# Altium PCB MotorBoardV2.PcbDoc
Units mm, origin at the board's own origin, x right, y up, seen from the top; angles counter-clockwise.
Board outline 45.2 x 89.45 mm, 2 copper layers (Top, Bottom), stack 1.67 mm thick; 40 components, 22 nets, 149 pads, 44 vias.
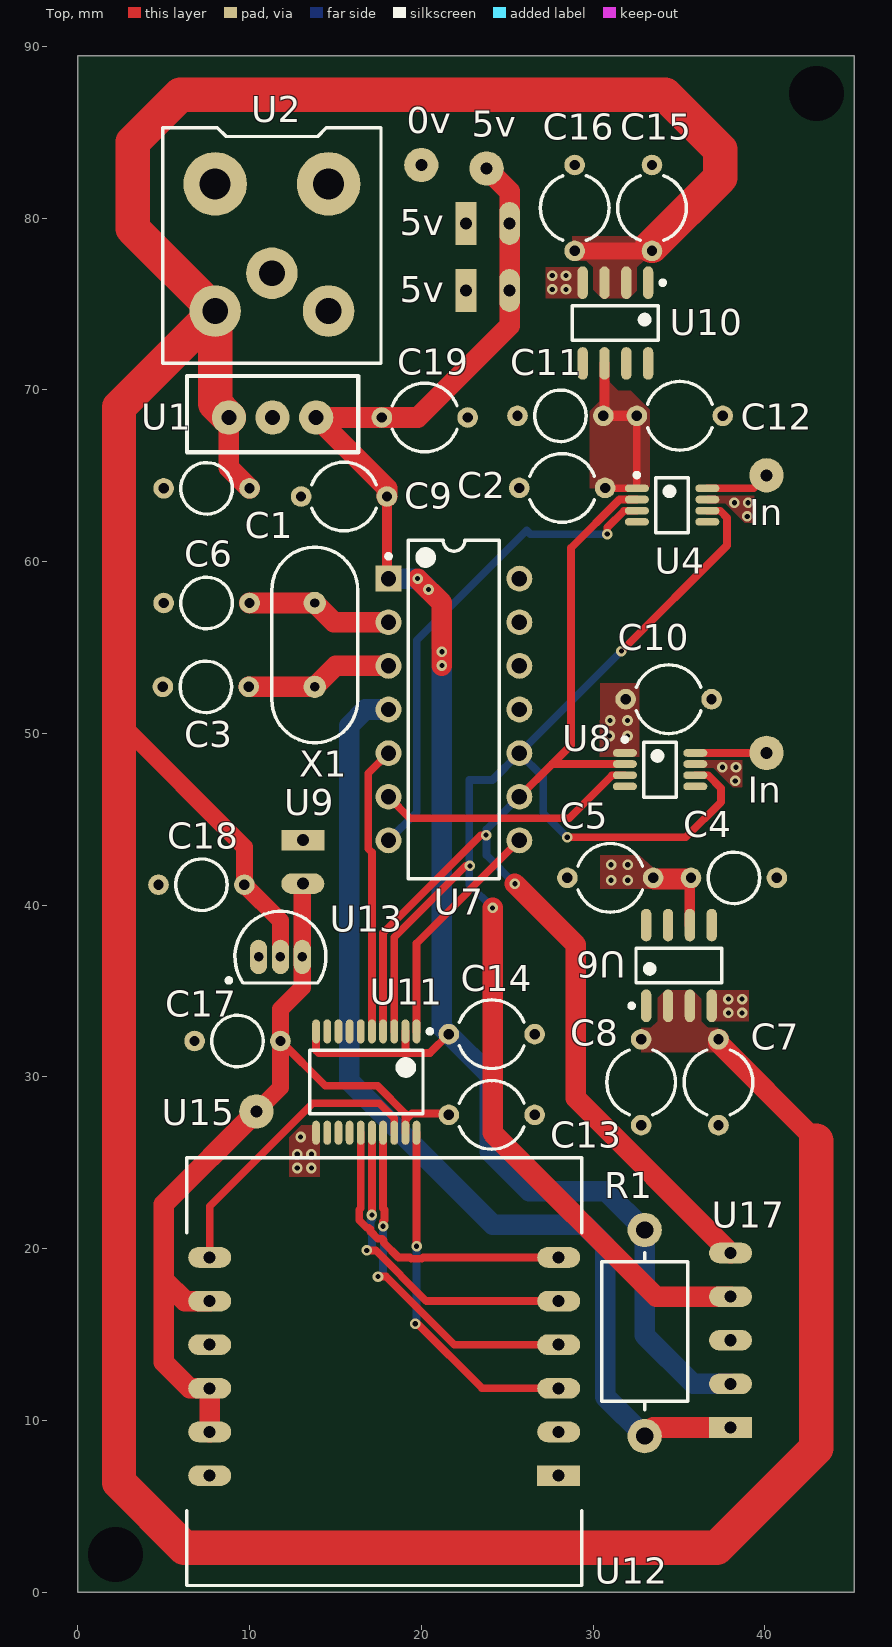
[diagram p0: Top view]
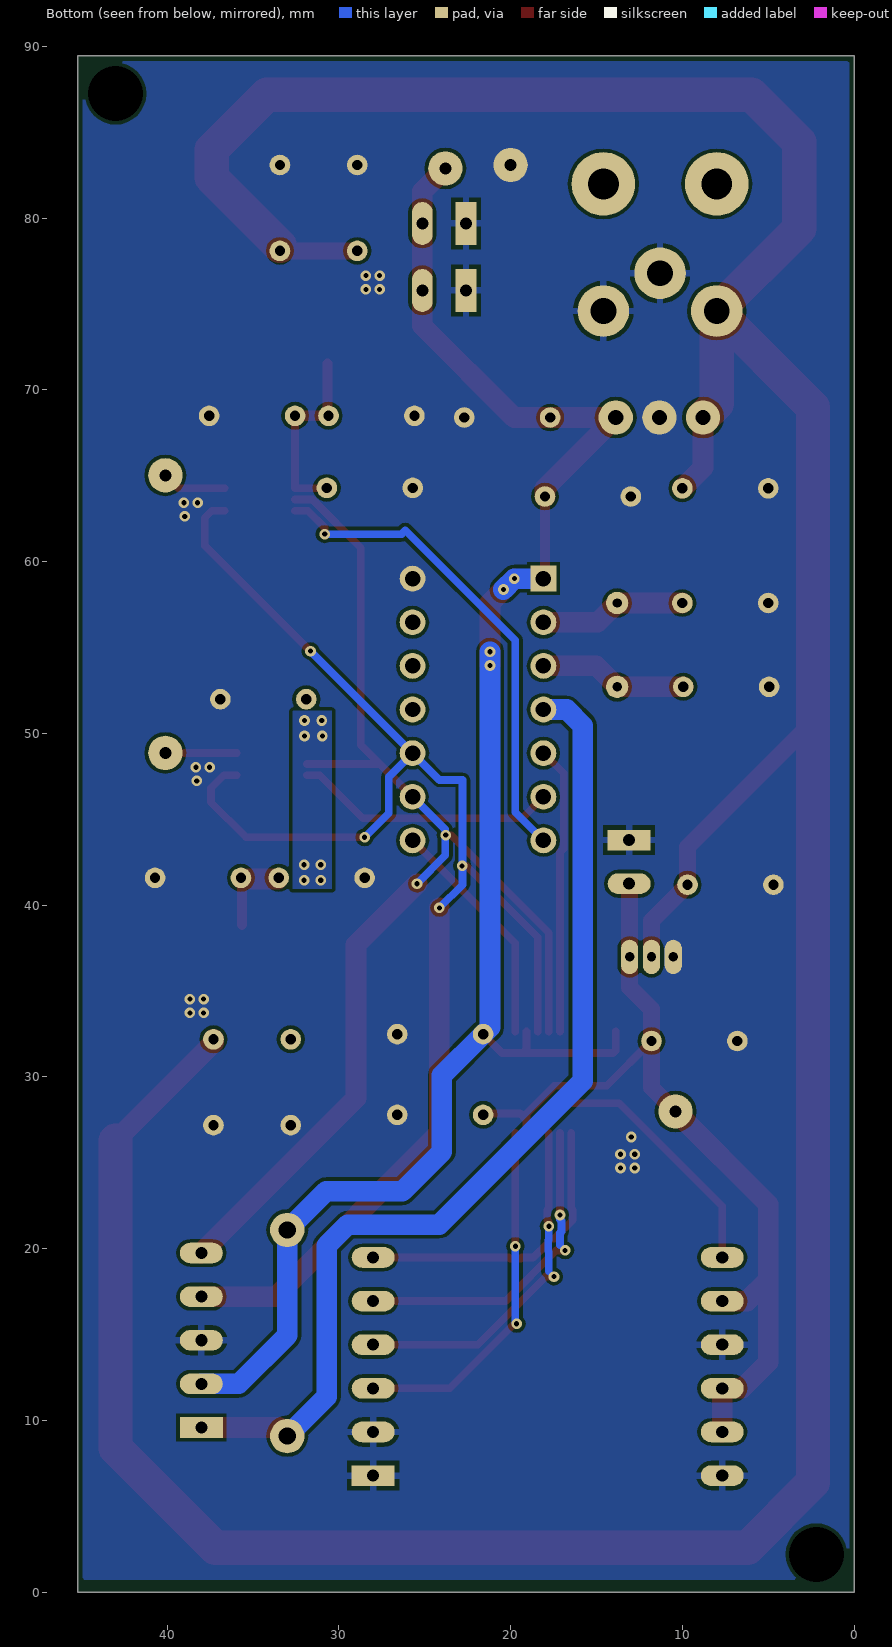
[diagram p1: Bottom view, seen from below]

## Layer stack, top to bottom
Top Solder: solder mask 0.0102, Solder Resist, Dk 3.5
Top: signal copper 0.035
Dielectric1: core 1.6, FR-4, Dk 4.58
Bottom: signal copper 0.035
Bottom Solder: solder mask 0.0102, Solder Resist, Dk 3.5

## Board outline
0,0 0,89.45 45.2,89.45 45.2,0

## Design rules (kind name [scope] priority, off if disabled: settings)
AssemblyTestPointUsage [All] p1 off:
AssemblyTestpoint [All] p1 off: testpointundercomponent=TRUE minsize=1.016 maxsize=2.54 preferedsize=1.524 minholesize=0 maxholesize=1.016 preferedholesize=0.813 testpointgrid=0.025 usegrid=TRUE gridtolerance=0 allowsidetop=TRUE allowsidebottom=TRUE
Clearance ClearanceViaPad [IsVia vs IsPad] p1: gap=0.1
Clearance ClearanceGNDpolygons [InPolygonClass('GNDpolygons')] p2: gap=0.3
Clearance ClearanceTechnology [All] p3: gap=0.2
FabricationTestPointUsage [All] p1 off: valid=0 allowmultiple=FALSE
FabricationTestpoint [All] p1 off: side=3 testpointundercomponent=TRUE minsize=1.016 maxsize=2.54 preferedsize=1.524 minholesize=0 maxholesize=1.016 preferedholesize=0.813 testpointgrid=0.025 allowsidetop=TRUE allowsidebottom=TRUE usegrid=TRUE gridtolerance=0
HoleSize [All] p1: absolutevalues=TRUE maxlimit=6.3 minlimit=0.3 maxpercent=80.000 minpercent=20.000
HoleToHoleClearance [All] p1: gap=0.3 allowstackedmicrovias=TRUE
MinimumAnnularRing [All] p1: minimumring=0.152
MinimumSolderMaskSliver [All] p1: minsoldermaskwidth=0.1
PlaneClearance [All] p1: clearance=0.25
PolygonConnect PolygonConnectVia [IsVia] p1: connectstyle=Direct reliefconductorwidth=0.4 reliefentries=4 polygonreliefangle="90 Angle" airgapwidth=0.254
PolygonConnect PolygonConnectBigPads [(ObjectKind = 'Pad') And ((AsMM(PadXSize_AllLayers) > 2) Or (AsMM(PadYSize_AllLayers) > 2))] p2: connectstyle=Relief reliefconductorwidth=0.4 reliefentries=4 polygonreliefangle="90 Angle" airgapwidth=0.254
PolygonConnect PolygonConnectGeneral [All] p3: connectstyle=Direct reliefconductorwidth=0.3 reliefentries=4 polygonreliefangle="90 Angle" airgapwidth=0.2
RoutingVias [All] p1: holewidth=0.6 width=1.2 viastyle="Through Hole" minholewidth=0.3 minwidth=0.62 maxholewidth=0.9 maxwidth=1.4
SilkToSilkClearance [All] p1: silktosilkclearance=0.15
SilkToSolderMaskClearance SilkscreenOverComponentPads [IsPad] p1: minsilkscreentomaskgap=0.1 clearancetoexposedcopper=FALSE
SolderMaskExpansion [All] p1: expansion=0.1
UnpouredPolygon [All] p1: allowunpoured=FALSE
Width WidthTechnology [All] p1: maxlimit=3 minlimit=0.16 preferedwidth=0.6
19 further rules are at their usual default settings.

## Components (designator, comment, footprint, x,y, rotation, side; value= is the part's Value field where it differs from the comment)
0v "Ground" Ground 20,83.09 r0 top (schematic designator U16)
5v "SignalOut" SignalOut 22.6,75.79 r90 top (schematic designator U3)
5v "SignalOut" SignalOut 22.6,79.69 r90 top (schematic designator U5)
5v "Ref" Ground 23.8,82.89 r0 top (schematic designator U14)
C1 "330nF" "FK18/24 Capacitor" 5,64.265 r0 top
C2 "680nF" "FK26/16 Capacitor" 25.7,64.29 r0 top
C3 "27pF" "FK18/24 Capacitor" 4.952,52.71 r0 top
C4 "1uF" "FK18/24 Capacitor" 40.7,41.59 r180 top
C5 "0.1uF" "FK26/16 Capacitor" 28.5,41.59 r0 top
C6 "27pF" "FK18/24 Capacitor" 5,57.59 r0 top
C7 "0.1uF" "FK26/16 Capacitor" 37.3,27.19 r90 top
C8 "10uF" "FK26/16 Capacitor" 32.8,27.19 r90 top
C9 "0.1uF" "FK26/16 Capacitor" 13,63.79 r0 top
C10 "680nF" "FK26/16 Capacitor" 36.9,51.99 r180 top
C11 "1uF" "FK18/24 Capacitor" 25.6,68.49 r0 top
C12 "0.1uF" "FK26/16 Capacitor" 37.55,68.49 r180 top
C13 "0.1uF" "FK26/16 Capacitor" 26.6,27.79 r180 top
C14 "0.1uF" "FK26/16 Capacitor" 21.6,32.49 r0 top
C15 "0.1uF" "FK26/16 Capacitor" 33.429,83.09 r270 top
C16 "10uF" "FK26/16 Capacitor" 28.929,83.09 r270 top
C17 "1uF" "FK18/24 Capacitor" 6.8,32.09 r0 top
C18 "1uF" "FK18/24 Capacitor" 4.7,41.19 r0 top
C19 "DNP" "FK26/16 Capacitor" 22.7,68.39 r180 top
In "Ref" Ground 40.1,65.025 r0 top (schematic designator U18)
In "Ref" Ground 40.1,48.865 r0 top (schematic designator U19)
R1 "DNP" "Axial 0.5" 33.005,9.09 r90 top
U1 "+5V LDO" MC7805CTG 8.8,68.39 r90 top
U2 "PJ-047A" PJ-047A 8,74.59 r90 top
U4 "AD7476ABRMZ" RM-8_L 34.6,63.29 r0 top
U6 "REF195GSZ" ADI-R-8_L 35,36.49 r90 top
U7 "PIC16F1455-I/P" MCHP-PDIP-P14 21.9,51.39 r0 top
U8 "AD7478AARMZ" RM-8_L 33.9,47.89 r0 top
U9 "SignalOut" SignalOut 13.1,43.79 r0 top
U10 "REF195GSZ" ADI-R-8_L 31.3,73.89 r270 top
U11 "TXB0108PWR" TSOP65P640X120-20N 16.8,29.701 r270 top
U12 "WIZ820io" WIZ5200 28,6.79 r180 top
U13 "MCP1700-3302E/TO" TO-92-TO3 11.8,36.99 r270 top
U15 "Ref" Ground 10.4,27.99 r0 top
U17 "ProgrammingHeader" ProgrammingHeader 38.005,9.59 r180 top
X1 "16MHz" 9B-16.000MEEJ-B 13.8,57.59 r270 top

## Footprints (in the part's own frame and the unit in brackets; to place one, negate y for a bottom-side part, rotate by r counter-clockwise, add the part's x,y. Pads: shape width x height; smd on the part's side, far side on the other; paste and mask are expansions set on the pad)
9B-16.000MEEJ-B [mm]
  round 1.3 hole 0.55: 1(0,0) 2(4.88,0)
  silkscreen extent -3.25,-2.5 8.13,2.5
ADI-R-8_L [mm] "SOIC, 8-Leads, Body 4.9x3.9mm, Pitch 1.27mm, IPC High Density"
  oval 1.9x0.6 smd: 1(-2.35,1.905) 2(-2.35,0.635) 3(-2.35,-0.635) 4(-2.35,-1.905) 5(2.35,-1.905) 6(2.35,-0.635) 7(2.35,0.635) 8(2.35,1.905)
  silkscreen extent -2.47,-2.5 1,2.88, body extent -2,-2.5 2,2.5, height 1.75
"Axial 0.5" [mm]
  round 2 hole 1: 1(0,0) 2(12,0)
  silkscreen extent 1.52,-2.5 10.67,2.5
"FK18/24 Capacitor" [mm]
  round 1.2 hole 0.6: 1(0,0) 2(5,0)
  silkscreen extent 1,-1.5 4,1.5
"FK26/16 Capacitor" [mm]
  round 1.2 hole 0.6: 1(0,0) 2(5,0)
  silkscreen extent 0.62,-2 4.38,2
Ground [mm]
  round 2 hole 0.7: 1(0,0)
MC7805CTG [mm]
  round 2 hole 0.88: 1(0,0) 2(0,-2.54) 3(0,-5.08)
  silkscreen extent -2.03,-7.52 2.41,2.44
MCHP-PDIP-P14 [mm] "DIP, 14-Leads, Body 19.177x6.604mm, Pitch 2.54mm"
  rect 1.5x1.5 hole 0.9: 1(-3.81,7.62)
  round 1.5 hole 0.9: 2(-3.81,5.08) 3(-3.81,2.54) 4(-3.81,0) 5(-3.81,-2.54) 6(-3.81,-5.08) 7(-3.81,-7.62) 8(3.81,-7.62) 9(3.81,-5.08) 10(3.81,-2.54) 11(3.81,0) 12(3.81,2.54) 13(3.81,5.08) 14(3.81,7.62)
  silkscreen extent -3.93,-9.85 2.65,9.85, body extent -3.95,-9.85 3.95,9.85, height 5.34
PJ-047A [mm]
  round 3 hole 1.5: 1(0,0) 2(0,-6.6) 2(2.2,-3.3)
  round 3.7 hole 1.8: ""(7.4,-6.6) ""(7.4,0)
  silkscreen extent -3.05,-9.65 10.67,3.05
ProgrammingHeader [mm]
  rect 2.5x1.2 hole 0.7: 1(0,0)
  oval 2.5x1.2 hole 0.7: 2(0,-2.54) 3(0,-5.08) 4(0,-7.62) 5(0,-10.16)
RM-8_L [mm] "TSOP, 8-Leads, Body 3x3mm, Pitch 0.65mm, IPC High Density"
  oval 1.4x0.45 smd mask+0: 1(-2.05,0.975) 2(-2.05,0.325) 3(-2.05,-0.325) 4(-2.05,-0.975) 5(2.05,-0.975) 6(2.05,-0.325) 7(2.05,0.325) 8(2.05,0.975)
  silkscreen extent -2.17,-1.6 0.95,1.87, body extent -1.6,-1.6 1.6,1.6, height 1.1
SignalOut [mm]
  rect 2.5x1.2 hole 0.7: 1(0,0)
  oval 2.5x1.2 hole 0.7: 2(0,-2.54)
TO-92-TO3 [mm] "TO, Flat Index; 3 In-Line, Axial Leads; Body Dia. 4.8mm; Leads 0.56 x 0.53 mm (max)"
  oval 2x1 hole 0.55 mask+0.05: 1(0,-1.27) 2(0,0) 3(0,1.27)
  silkscreen extent -2.65,-3.13 1.52,2.65, body extent -2.66,-2.66 1.52,2.66, height 5.33
TSOP65P640X120-20N [mm] "TSOP, 20-Leads, Body 6.50x4.40mm, Pitch 0.65mm, IPC Medium Density"
  oval 1.4x0.45 smd mask+0.02: 1(-2.95,2.925) 2(-2.95,2.275) 3(-2.95,1.625) 4(-2.95,0.975) 5(-2.95,0.325) 6(-2.95,-0.325) 7(-2.95,-0.975) 8(-2.95,-1.625) 9(-2.95,-2.275) 10(-2.95,-2.925) 11(2.95,-2.925) 12(2.95,-2.275) 13(2.95,-1.625) 14(2.95,-0.975) 15(2.95,-0.325) 16(2.95,0.325) 17(2.95,0.975) 18(2.95,1.625) 19(2.95,2.275) 20(2.95,2.925)
  silkscreen extent -3.07,-3.3 1.85,3.83, body extent -2.25,-3.3 2.25,3.3, height 1.2
WIZ5200 [mm]
  rect 2.5x1.2 hole 0.7: 1(0,0)
  oval 2.5x1.2 hole 0.7: 2(0,-2.54) 3(0,-5.08) 4(0,-7.62) 5(0,-10.16) 6(0,-12.7) 7(20.32,-12.7) 8(20.32,-10.16) 9(20.32,-7.62) 10(20.32,-5.08) 11(20.32,-2.54) 12(20.32,0)
  silkscreen extent -1.34,-18.5 21.66,6.4

## Part data
C1: library part FK24X7R1H334K, "CAP CER 0.33UF 50V 10% RADIAL"
C2 C10: library part FK26X7R1H684K, "CAP CER 0.68UF 50V 10% RADIAL"
C3 C6: library part FK18C0G1H270J, "CAP CER 27PF 50V 5% RADIAL"
C4 C11 C17 C18: library part FK24X7R1H105K, "CAP CER 1UF 50V 10% RADIAL"
C5 C7 C9 C12 C13 C14 C15: library part FK26X7R2A104K, "CAP CER 0.1UF 100V 10% RADIAL"
C8 C16: library part FK16X7R1C106K, "CAP CER 10UF 16V 10% RADIAL"
C19: library part "DNP Cap"
R1: library part "DNP Res"
U1: library part MC7805CTG, "IC REG LDO 5V 1A TO220AB"
U2: "CON PWR JCK 2.0 X 6.0MM W/SHLD"
U4: "Single 12-Bit Analog-to-Digital Converter with Serial, SPI Interface, 2.35 to 5.25 V, 1MSPS, -40 to +85 degC, RM-8, Pb-Free, Tube"
U6 U10: "Precision Micropower, Low Dropout Voltage Reference, 5 V Output, 5.1 to 15 V Supply, Industrial, 8-pin SOIC (R-8), Tube"
U7: "8-Bit Flash USB Microcontroller with XLP Technology, 48 MHz, 11 I/O, -40 to 85 degC, 14-pin PDIP (P14), Tube"
U8: "Single 8-Bit Analog-to-Digital Converter with Serial, SPI Interface,2.35 V, 1.2MSPS, -40 to +85 degC, RM-8, Pb-Free, Tube"
U11: "IC 8-BIT TRNSTR 15KV ESD 20TSSOP"
U12: "Ethernet Modules W5200 & MAG JACK ioPLATFORM MODULE"
U13: "Low Quiescent Current LDO, 3-Pin TO-92, Extended TemperatureBAG"
X1: library part 9B-16.000MEEJ-B, "CRYSTAL 16MHZ 18PF THRU"

## Free pads (board coordinates)
  round 0 hole 3.2: 0(2.2,2.2) 0(43,87.25)

## Via types
v1: diameter 0.62, hole 0.3, Top to Bottom, 40 vias
v2: diameter 0.62, hole 0.3, Top to Bottom, tented bottom, 4 vias

## Nets (pads, with @x,y where several pads share a name; then routed paths per layer and width w, separated by ;. In a path a pad name is that pad's centre, name@x,y a point inside that pad or via, vN(x,y) a via of type N, cw(c..) or ccw(c..) an arc to the next point about the centre after c; other vN are vias at no path point)
GND: 0v.1 5v.1@22.6,75.79 5v.1@22.6,79.69 C1.1 C2.1 C3.1 C4.1 C5.1 C6.1 C7.1 C8.1 C9.1 C10.1 C11.1 C12.1 C13.1 C14.2 C15.1 C16.1 C17.1 C18.1 C19.1 U1.2 U2.2 U4.7 U6.4 U7.14 U8.7 U9.1 U10.4 U11.11 U12.1 U12.2 U12.9 U12.12 U13.1 U17.3 | length 0.1
  Top w0.6: U1.2@11.3,68.43 U1.2
  other v1: 12.775,24.7 13.6,24.7 12.775,25.5 13.6,25.5 12.975,26.5 37.875,33.73 38.675,33.73 37.875,34.53 38.675,34.53 37.525,48.025 38.225,63.425 27.625,75.85 28.425,75.85 27.625,76.65 28.425,76.65
  other v2: 38.275,47.236 38.325,48.025 38.975,62.636 39.025,63.425
MCLR: R1.1 U7.4 U17.1 | length 59.5
  Top w1.2: R1.1 33.505,9.59 U17.1
  Bottom w1.2: U7.4 16.74,51.39 15.8,50.45 15.8,29.759 24.155,21.403 29.477,21.403 30.7,20.18 30.7,11.395 R1.1
NetC3_2: C3.2 U7.3 X1.2 | length 8.6
  Top w1.2: C3.2 X1.2 15.02,53.93 U7.3
NetC6_2: C6.2 U7.2 X1.1 | length 8.6
  Top w1.2: C6.2 X1.1 14.92,56.47 U7.2
NetU4_3: U4.3 U7.7 | length 28.7
  Top w0.45: v1(30.825,61.6) 30.825,61.984 31.806,62.965 U4.3
  Bottom w0.45: U7.7 19.73,45.41 19.73,55.42 26.134,61.824 26.359,61.6 v1(30.825,61.6)
NetU4_8: In.1@40.1,65.025 U4.8 | length 3.8
  Top w0.45: U4.8 39.34,64.265 In.1@40.1,65.025
NetU7_5: U7.5 U11.5 | length 16.8
  Top w0.45: U11.5 17.125,43.073 16.915,43.283 16.915,47.675 U7.5
NetU7_6: U7.6 U8.3 | length 15.3
  Top w0.45: U7.6 19.333,45.068 28.608,45.068 31.106,47.565 U8.3
NetU7_8: U7.8 U11.1 | length 13.6
  Top w0.45: U11.1 19.725,37.785 U7.8
NetU8_8: In.1@40.1,48.865 U8.8 | length 4.1
  Top w0.45: U8.8 In.1@40.1,48.865
NetU11_15: U11.15 U12.6 | length 17.8
  Top w0.45: U11.15 16.475,22.349 16.39,22.264 16.39,21.655 16.821,21.224 16.941,21.224 17.04,21.125 17.04,21.005 17.471,20.574 17.711,20.574 17.813,20.472 17.813,20.352 18.675,19.49 19.339,19.49 19.421,19.409 20.029,19.409 20.111,19.49 U12.6
NetU11_16: U11.16 U12.5 | length 19
  Top w0.45: v1(16.826,19.901) 17.345,19.901 20.296,16.95 U12.5 ; v1(17.125,21.959) U11.16
  Bottom w0.45: 17.125,20.215 17.125,20.92 17.04,21.005 17.04,21.614 17.125,21.699 v1(17.125,21.959)
NetU11_17: U11.17 U12.4 | length 20.3
  Top w0.45: v1(17.476,18.376) 17.95,18.376 21.917,14.41 U12.4 ; v1(17.775,21.309) 17.775,21.57 17.86,21.655 17.86,22.264 17.775,22.349 U11.17
  Bottom w0.45: 17.775,18.69 17.775,19.826 17.813,19.863 17.813,20.472 17.775,20.51 v1(17.775,21.309)
NetU11_18: U11.18 U12.7 | length 17.4
  Top w0.45: U12.7 7.68,22.47 13.684,28.474 17.544,28.474 18.425,27.593 U11.18
NetU11_20: U11.20 U12.3 | length 21
  Top w0.45: v1(19.651,15.626) 19.781,15.626 23.537,11.87 U12.3 ; v1(19.725,20.144) U11.20
  Bottom w0.45: v1@19.725,15.69 v1(19.725,20.144)
PGC: U4.2 U7.9 U8.2 U11.4 U17.5 | length 72.3
  Top w0.45: U11.4 17.775,38.393 23.458,44.075 v1(23.775,44.075) ; U7.9 27.615,48.215 ; U8.2 27.615,48.215 ; U4.2 31.537,63.615 28.722,60.8 28.722,49.322 27.615,48.215
  Top w1.2: v1(25.45,41.25) 29,37.7 29,28.755 U17.5
  Bottom w0.45: v1(25.45,41.25) 23.8,42.9 23.8,44.418 23.818,44.418 U7.9
PGD: U4.6 U7.10 U8.6 U11.3 U17.4 | length 92.6
  Top w0.45: U11.3 18.425,38.123 22.591,42.289 v1(22.825,42.289) ; v1(28.5,43.95) 35.4,43.95 37.45,46 37.45,46.809 36.694,47.565 U8.6 ; v1(31.65,54.79) 37.8,60.94 37.8,62.559 37.394,62.965 U4.6@36.65,62.965
  Top w1.2: v1(24.15,39.84) 24.15,26.74 33.68,17.21 U17.4
  Bottom w0.45: v1(24.15,39.84) 22.796,41.194 22.796,42.494 22.796,47.286 24.146,47.286 U7.10 ; v1(28.5,43.95) 27.1,45.35 27.1,47.46 U7.10 ; v1(31.65,54.79) U7.10
V3V3: C13.2 C17.2 U9.2 U11.19 U12.8 U12.10 U12.11 U13.3 U15.1 | length 53.9
  Top w0.45: C17.2 14.4,29.49 17.447,29.49 19.075,27.862 U11.19 19.075,27.495 19.456,27.876 21.6,27.876 C13.2
  Top w1: U15.1 11.8,29.39 C17.2 11.8,33.94 13.07,35.21 U13.3 U9.2@13.07,41.22
  Top w1.2: U12.11 U12.10 6.52,11.87 5,13.39 5,18.19 ; U12.8 6.24,16.95 5,18.19 ; U15.1 5,22.59 5,18.19
VCC: 5v.1@23.8,82.89 5v.2 C9.2 C14.1 C19.2 R1.2 U1.3 U7.1 U11.2 U11.10 U17.2 | length 106.6
  Top w0.45: U11.10 13.875,31.54 14.025,31.39 19.3,31.39 ; U11.2 19.075,31.615 19.3,31.39 ; C14.1 20.5,31.39 19.3,31.39
  Top w0.6: U7.1@18,59.1 C9.2
  Top w1.2: C9.2 18,64.27 U1.3 C19.2 19.8,68.39 25.14,73.73 25.14,75.79 25.14,81.55 5v.1@23.8,82.89 ; v1(19.783,59.01) 21.2,57.593 v1(21.2,53.95)
  Bottom w1.2: U7.1 v1(19.783,59.01) v1(20.418,58.375) ; v1(21.2,54.75) 21.2,32.89 C14.1 24,30.09 24,25.65 26.3,23.35 30.745,23.35 R1.2 33.005,14.95 35.825,12.13 U17.2
VIN: C1.2 C7.2 C8.2 C15.2 C16.2 C18.2 U1.1 U2.1 U6.2 U6.3 U10.2 U10.3 U13.2 | length 230.5
  Top w1: 2.4,50.69 9.7,43.39 C18.2 11.8,39.09 U13.2 ; C16.2 C15.2 C15.2@33.429,78.39
  Top w1.2: U1.1 8.8,65.465 C1.2 ; C7.2 37.3,31.99 43,26.29
  Top w2: U1.1 8,69.19 U2.1 ; C15.2@33.429,78.39 37.4,82.361 37.4,83.99 34.2,87.19 5.964,87.19 3.2,84.427 3.2,79.39 U2.1 ; 43,26.29 43,8.39 37.2,2.59 6.2,2.59 2.4,6.39 2.4,50.69 2.4,68.99 U2.1
VREF8: C4.2 C5.2 C10.2 U6.6 U8.1 | length 4.8
  Top w0.6: U6.6 C4.2@35.635,41.525
  Top w1.2: C5.2@33.565,41.525 C4.2@35.635,41.525
  other v1: 31.05,41.45 32.021,41.45 31.05,42.35 32.021,42.35 30.961,49.85 32,49.85 30.993,50.748 32,50.748
VREF12: C2.2 C11.2 C12.2 U4.1 U10.6 | length 11
  Top w0.45: C2.2 30.725,64.265 U4.1 C12.2
  Top w0.6: U10.6 30.665,68.555 30.73,68.49 C12.2
pads on no net: U2. U4.4 U4.5 U6.1 U6.5 U6.7 U6.8 U7.11 U7.12 U7.13 U8.4 U8.5 U10.1 U10.5 U10.7 U10.8 U11.6 U11.7 U11.8 U11.9 U11.12 U11.13 U11.14

## Polygon pours and split planes (outlines as drawn)
GND on Top "GND Plane Top" (solid, pour order 21): 14.1,27.19 14.1,24.175 12.3,24.175 12.3,26.45 12.3,26.49 13,27.19
GND on Top "GNP Plane Top" (solid, pour order 14): 27.25,75.33 27.25,77.13 29.383,77.13 29.383,75.33
VREF12 on Top "VRef12 Plane Top" (solid, pour order 20): 30.4,70.49 30.4,69.35 29.8,68.75 29.8,64.265 33.205,64.265 33.3,64.36 33.3,68.49 33.3,68.85 32.4,69.75 32.2,69.95 31.5,69.95 31.461,69.95 30.961,70.45 30.961,70.49
VIN on Top "Vin Plane Top" (solid, pour order 15): 31.935,75.33 30.665,75.33 30.5,75.33 30,75.83 30,77.13 29.7,77.43 29.6,77.53 28.8,77.53 28.8,78.93 33.5,78.93 33.5,77.53 33,77.53 32.945,77.53 32.545,77.13 32.545,75.83 32.545,75.775 32.1,75.33
VREF8 on Top "VRef8 Plane Top" (solid, pour order 19): 32.675,42.9 30.405,42.9 30.405,40.95 33.472,40.95 33.5,40.978 33.5,42.177
VREF8 on Top "GNP Plane Top" (solid, pour order 17): 32.675,48.65 32.675,52.928 31.223,52.928 30.405,52.927 30.396,48.65
VIN on Top "GNP Plane Top" (solid, pour order 16): 34.365,35.05 35.635,35.05 35.8,35.05 36.3,34.55 36.3,33.25 36.6,32.95 36.7,32.85 37.3,32.85 37.3,31.45 32.8,31.45 32.8,32.85 33.3,32.85 33.355,32.85 33.755,33.25 33.755,34.55 33.755,34.605 34.2,35.05 34.365,35.05
GND on Top "GND Top Bottom" (solid, pour order 24): 35.95,48.425 38.675,48.425 38.675,46.9 38.65,46.875 38.325,46.875 38.125,46.875 37,48 35.95,48
GND on Top "GND Top Bottom" (solid, pour order 23): 36.65,63.825 39.375,63.825 39.375,62.3 39.35,62.275 39.025,62.275 38.825,62.275 37.7,63.4 36.65,63.4
GND on Top "GNP Plane Top" (solid, pour order 13): 39.05,35.05 39.05,33.25 36.917,33.25 36.917,35.05
GND on Bottom "GND Plane Bottom" (solid, pour order 22): 0.3,0.74 0.3,89.14 44.9,89.14 44.9,0.74
VREF8 on Bottom "VRef8 Plane Bottom" (solid, pour order 18): 30.405,51.306 32.675,51.306 32.675,40.95 30.405,40.95

## Silkscreen, mask and mechanical layers (free items; w line width, h text height)
Outline:
  the board outline again, w0.25

## Panel: embedded boards
"" at 0,0, 2 rows x 1 columns, spacing 100 x 100, rotation 0